# EAGLE board semafor-b-panel (EAGLE 9.2.2)
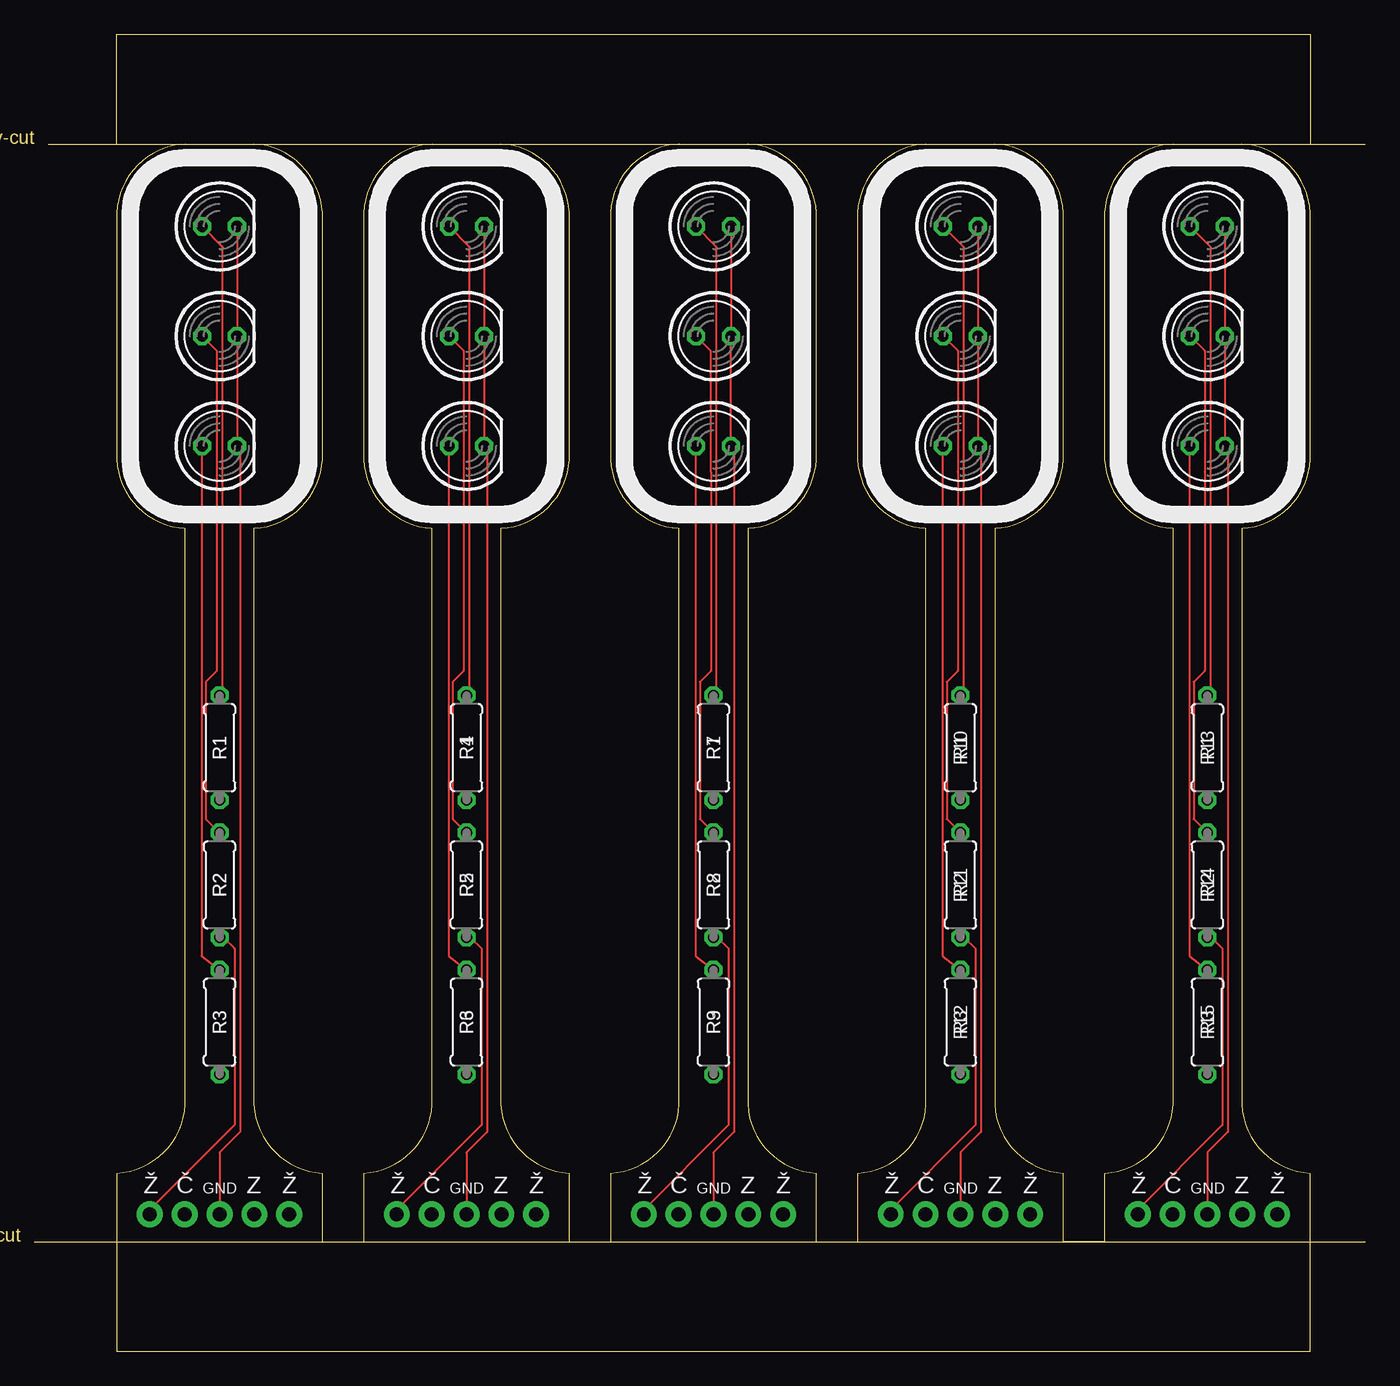
[diagram p0: board, top side]
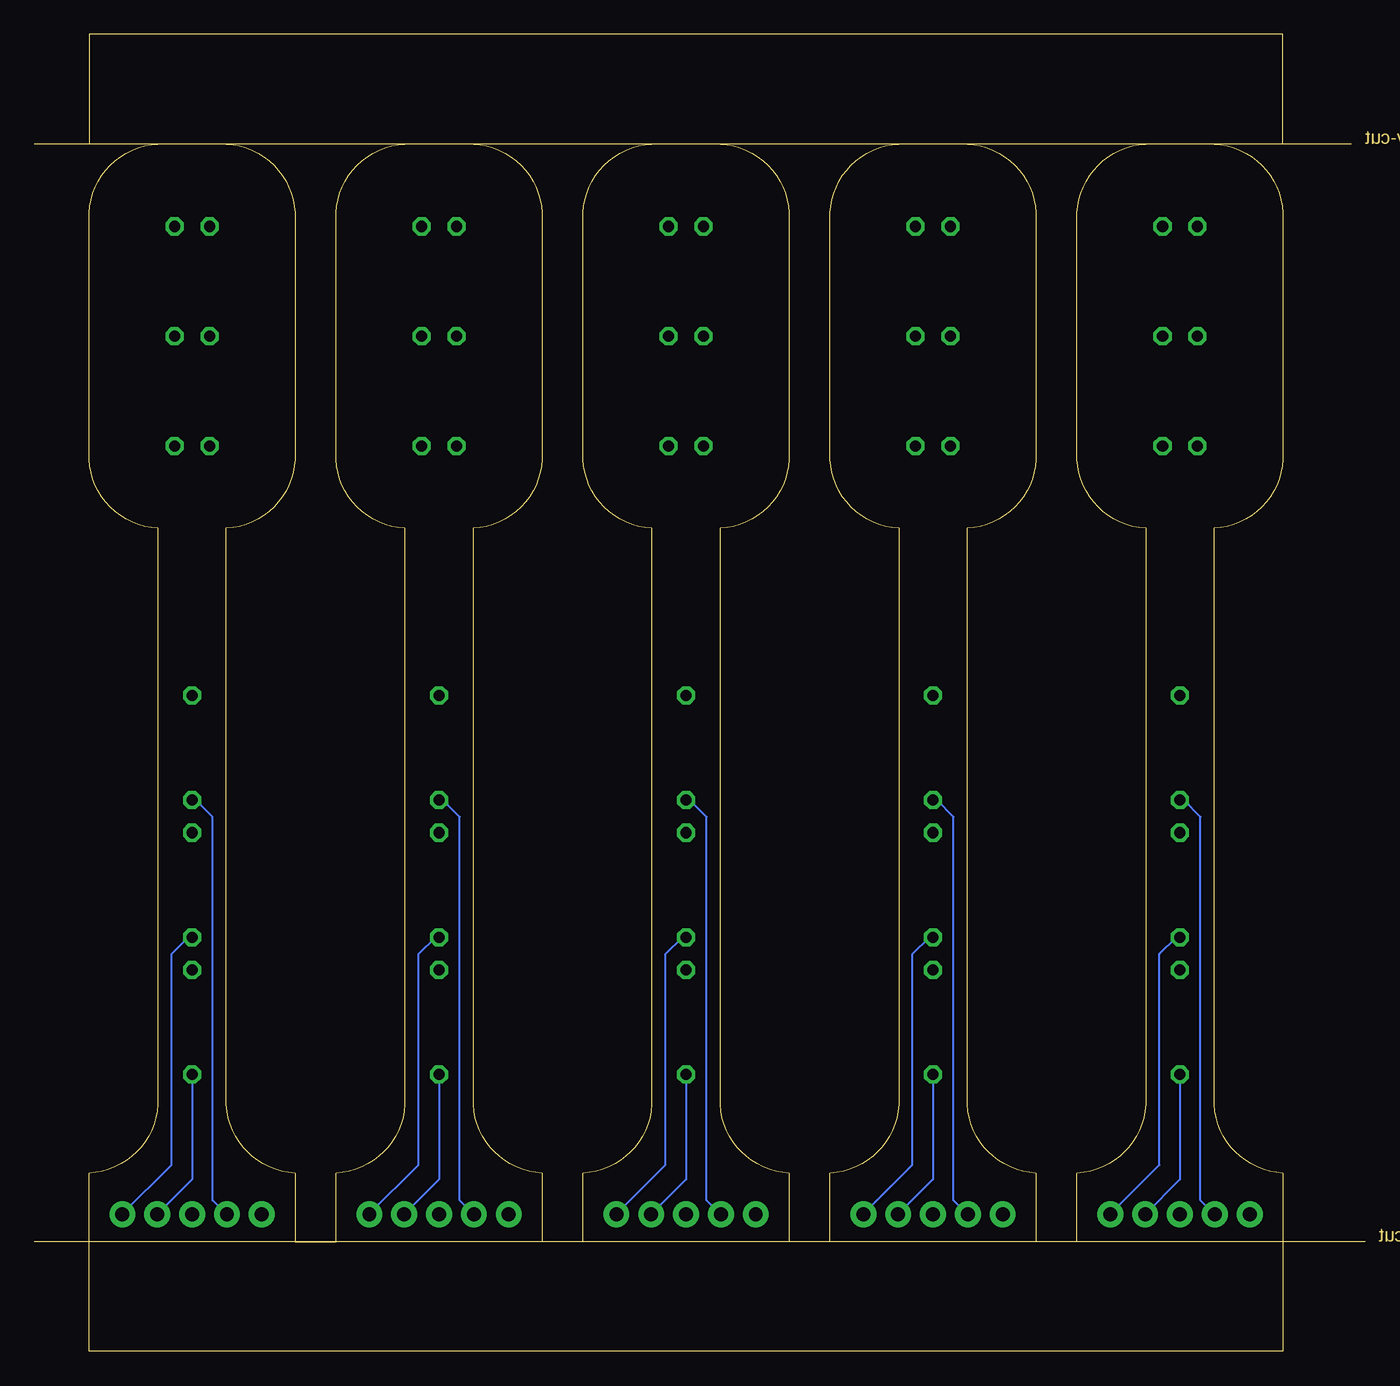
[diagram p1: board, bottom side, seen from below]

Size 97 x 96 mm. Coordinates in mm from the lower left corner, seen from the top.
Outline: 0,8 97,8
Outline: 1,88 97,88
Outline: 21,8 21,13 arc-84 16,18 16,60 arc84 21,65 21,83 arc84 16,88 29,88 arc84 24,83 24,65 arc84 29,60 29,18 arc-84 24,13 24,8 21,8
Outline: 6,83 6,65 arc84 11,60 11,18 arc-84 6,13 6,0 93,0 93,13 arc-84 88,18 88,60 arc84 93,65 93,83 arc84 88,88 93,88 93,96 6,96 6,88 11,88 arc84 6,83
Outline: 39,8 39,13 arc-84 34,18 34,60 arc84 39,65 39,83 arc84 34,88 47,88 arc84 42,83 42,65 arc84 47,60 47,18 arc-84 42,13 42,8 39,8
Outline: 57,8 57,13 arc-84 52,18 52,60 arc84 57,65 57,83 arc84 52,88 65,88 arc84 60,83 60,65 arc84 65,60 65,18 arc-84 60,13 60,8 57,8
Outline: 75,8 75,13 arc-84 70,18 70,60 arc84 75,65 75,83 arc84 70,88 83,88 arc84 78,83 78,65 arc84 83,60 83,18 arc-84 78,13 78,8 75,8
Copper layers (1*16): Top 0.035mm / dielectric 1.5mm / Bottom 0.035mm
Design rules "SeeedStudio_2layer_DRU_no_angle_20140221": minimum track width 6mil, minimum drill 12mil, track to track 6mil, track to pad 6mil, pad to pad 6mil, via to via 6mil, smd to smd 0mil, copper to edge 10mil, drill to drill 10mil, minimum pad ring 10mil, minimum via ring 6mil, stop-mask expansion 2mil, vias tented up to drill 100mil, thermal gap 10mil

## Footprints (pad centres in the part's own frame; a part is rotated, then mirrored left to right if it is on the bottom)
1X05_NO_SILK = drill 1.016 pad 1.88: 1 0,0; 2 2.54,0; 3 5.08,0; 4 7.62,0; 5 10.16,0
LED5MM = drill 0.813 octagon: A -1.27,0; K 1.27,0
0207/7 = drill 0.813 octagon: 1 -3.81,0; 2 3.81,0

## Placement (x,y rotation side)
J1  [1X05_NO_SILK]  8.42,10 0 top
J2  [1X05_NO_SILK]  26.42,10 0 top
J3  [1X05_NO_SILK]  44.42,10 0 top
J4  [1X05_NO_SILK]  62.42,10 0 top
J5  [1X05_NO_SILK]  80.42,10 0 top
LED1  [LED5MM]  13.5,82 0 top
LED2  [LED5MM]  13.5,74 0 top
LED3  [LED5MM]  13.5,66 0 top
LED4  [LED5MM]  31.5,82 0 top
LED5  [LED5MM]  31.5,74 0 top
LED6  [LED5MM]  31.5,66 0 top
LED7  [LED5MM]  49.5,82 0 top
LED8  [LED5MM]  49.5,74 0 top
LED9  [LED5MM]  49.5,66 0 top
LED10  [LED5MM]  67.5,82 0 top
LED11  [LED5MM]  67.5,74 0 top
LED12  [LED5MM]  67.5,66 0 top
LED13  [LED5MM]  85.5,82 0 top
LED14  [LED5MM]  85.5,74 0 top
LED15  [LED5MM]  85.5,66 0 top
R1  [0207/7]  13.5,44 90 top
R2  [0207/7]  13.5,34 90 top
R3  [0207/7]  13.5,24 90 top
R4  [0207/7]  31.5,44 90 top
R5  [0207/7]  31.5,34 90 top
R6  [0207/7]  31.5,24 90 top
R7  [0207/7]  49.5,44 90 top
R8  [0207/7]  49.5,34 90 top
R9  [0207/7]  49.5,24 90 top
R10  [0207/7]  67.5,44 90 top
R11  [0207/7]  67.5,34 90 top
R12  [0207/7]  67.5,24 90 top
R13  [0207/7]  85.5,44 90 top
R14  [0207/7]  85.5,34 90 top
R15  [0207/7]  85.5,24 90 top

## Library data of the parts
J1-J5 = SparkFun-Connectors
LED1-LED15 = led
R1-R15 = rcl; SPICEPREFIX: R

## Nets
N$1: LED3.A R3.2
N$2: LED2.A R2.2
N$3: LED1.A R1.2
N$4: J1.3 LED1.K LED2.K LED3.K
N$5: J1.2 R1.1
N$6: J1.4 R3.1
N$7: J1.1 J1.5 R2.1
N$8: J2.3 LED4.K LED5.K LED6.K
N$9: J2.2 R4.1
N$10: J2.4 R6.1
N$11: J2.1 J2.5 R5.1
N$12: LED6.A R6.2
N$13: LED5.A R5.2
N$14: LED4.A R4.2
N$15: J3.3 LED7.K LED8.K LED9.K
N$16: J3.2 R7.1
N$17: J3.4 R9.1
N$18: J3.1 J3.5 R8.1
N$19: LED9.A R9.2
N$20: LED8.A R8.2
N$21: LED7.A R7.2
N$22: J4.3 LED10.K LED11.K LED12.K
N$23: J4.2 R10.1
N$24: J4.4 R12.1
N$25: J4.1 J4.5 R11.1
N$26: LED12.A R12.2
N$27: LED11.A R11.2
N$28: LED10.A R10.2
N$29: J5.3 LED13.K LED14.K LED15.K
N$30: J5.2 R13.1
N$31: J5.4 R15.1
N$32: J5.1 J5.5 R14.1
N$33: LED15.A R15.2
N$34: LED14.A R14.2
N$35: LED13.A R13.2

## Tracks (layer width: path | path; a pad name or v marks a point on that pad's centre or on a via)
N$1
  Top 0.152: LED3.A 12.23,65.93 12.2,65.97 12.2,28.84 R3.2
N$2
  Top 0.152: LED2.A 13.3,72.93 13.3,64.1 13.3,64.09 13.3,49.6 12.5,48.8 12.5,38.81 R2.2
N$3
  Top 0.152: LED1.A 13.7,80.53 13.7,48.01 R1.2
N$4
  Top 0.152: LED1.K LED2.K LED3.K 14.77,65.78 15,66 15,16 13.5,14.5 J1.3
N$5
  Bottom 0.152: J1.2 11,10 12,11 12,38.96 13.23,40.19 R1.1
N$6
  Bottom 0.152: R3.1 13.5,12.54 J1.4
N$7
  Top 0.152: J1.1 8.42,10.32 14.6,16.5 14.6,29.36 13.77,30.19 R2.1
  Bottom 0.152: J1.5 18.58,10.02 15,13.6 15,28.96 13.77,30.19 R2.1
N$8
  Top 0.152: LED4.K LED5.K LED6.K 32.77,65.78 33,66 33,16 31.5,14.5 J2.3
N$9
  Bottom 0.152: J2.2 29,10 30,11 30,38.96 31.23,40.19 R4.1
N$10
  Bottom 0.152: R6.1 31.5,12.54 J2.4
N$11
  Top 0.152: J2.1 26.42,10.32 32.6,16.5 32.6,29.36 31.77,30.19 R5.1
  Bottom 0.152: J2.5 36.58,10.02 33,13.6 33,28.96 31.77,30.19 R5.1
N$12
  Top 0.152: LED6.A 30.23,65.93 30.2,65.97 30.2,28.84 R6.2
N$13
  Top 0.152: LED5.A 31.3,72.93 31.3,64.1 31.3,64.09 31.3,49.6 30.5,48.8 30.5,38.81 R5.2
N$14
  Top 0.152: LED4.A 31.7,80.53 31.7,48.01 R4.2
N$15
  Top 0.152: LED7.K LED8.K LED9.K 50.77,65.78 51,66 51,16 49.5,14.5 J3.3
N$16
  Bottom 0.152: J3.2 47,10 48,11 48,38.96 49.23,40.19 R7.1
N$17
  Bottom 0.152: R9.1 49.5,12.54 J3.4
N$18
  Top 0.152: J3.1 44.42,10.32 50.6,16.5 50.6,29.36 49.77,30.19 R8.1
  Bottom 0.152: J3.5 54.58,10.02 51,13.6 51,28.96 49.77,30.19 R8.1
N$19
  Top 0.152: LED9.A 48.23,65.93 48.2,65.97 48.2,28.84 R9.2
N$20
  Top 0.152: LED8.A 49.3,72.93 49.3,64.1 49.3,64.09 49.3,49.6 48.5,48.8 48.5,38.81 R8.2
N$21
  Top 0.152: LED7.A 49.7,80.53 49.7,48.01 R7.2
N$22
  Top 0.152: LED10.K LED11.K LED12.K 68.77,65.78 69,66 69,16 67.5,14.5 J4.3
N$23
  Bottom 0.152: J4.2 65,10 66,11 66,38.96 67.23,40.19 R10.1
N$24
  Bottom 0.152: R12.1 67.5,12.54 J4.4
N$25
  Top 0.152: J4.1 62.42,10.32 68.6,16.5 68.6,29.36 67.77,30.19 R11.1
  Bottom 0.152: J4.5 72.58,10.02 69,13.6 69,28.96 67.77,30.19 R11.1
N$26
  Top 0.152: LED12.A 66.23,65.93 66.19,65.97 66.19,28.84 R12.2
N$27
  Top 0.152: LED11.A 67.3,72.93 67.3,64.1 67.31,64.09 67.31,49.6 66.5,48.8 66.5,38.81 R11.2
N$28
  Top 0.152: LED10.A 67.7,80.53 67.7,48.01 R10.2
N$29
  Top 0.152: LED13.K LED14.K LED15.K 86.77,65.78 87,66 87,16 85.5,14.5 J5.3
N$30
  Bottom 0.152: J5.2 83,10 84,11 84,38.96 85.23,40.19 R13.1
N$31
  Bottom 0.152: R15.1 85.5,12.54 J5.4
N$32
  Top 0.152: J5.1 80.42,10.32 86.6,16.5 86.6,29.36 85.77,30.19 R14.1
  Bottom 0.152: J5.5 90.58,10.02 87,13.6 87,28.96 85.77,30.19 R14.1
N$33
  Top 0.152: LED15.A 84.23,65.93 84.19,65.97 84.19,28.84 R15.2
N$34
  Top 0.152: LED14.A 85.3,72.93 85.3,64.1 85.31,64.09 85.31,49.6 84.5,48.8 84.5,38.81 R14.2
N$35
  Top 0.152: LED13.A 85.7,80.53 85.7,48.01 R13.2

## Text on the board
Dimension: v-cut | v-cut
tPlace: Ž | Č | GND | Z | Ž | Ž | Č | GND | Z | Ž | Ž | Č | GND | Z | Ž | Ž | Č | GND | Z | Ž | Ž | Č | GND | Z | Ž
_tNames: R1 | R1 | R1 | R1 | R1 | R2 | R2 | R2 | R2 | R2 | R3 | R3 | R3 | R3 | R3